# Altium PCB DSP6748_F.PcbDoc (part 15 of 16)
Units mil, origin at the board's own origin, x right, y up, seen from the top; angles counter-clockwise.
Board outline 8188.98 x 4055.12 mil, 4 copper layers (Top Layer, GND, VCC, Bottom Layer); 409 components, 262 nets, 1424 pads, 350 vias.
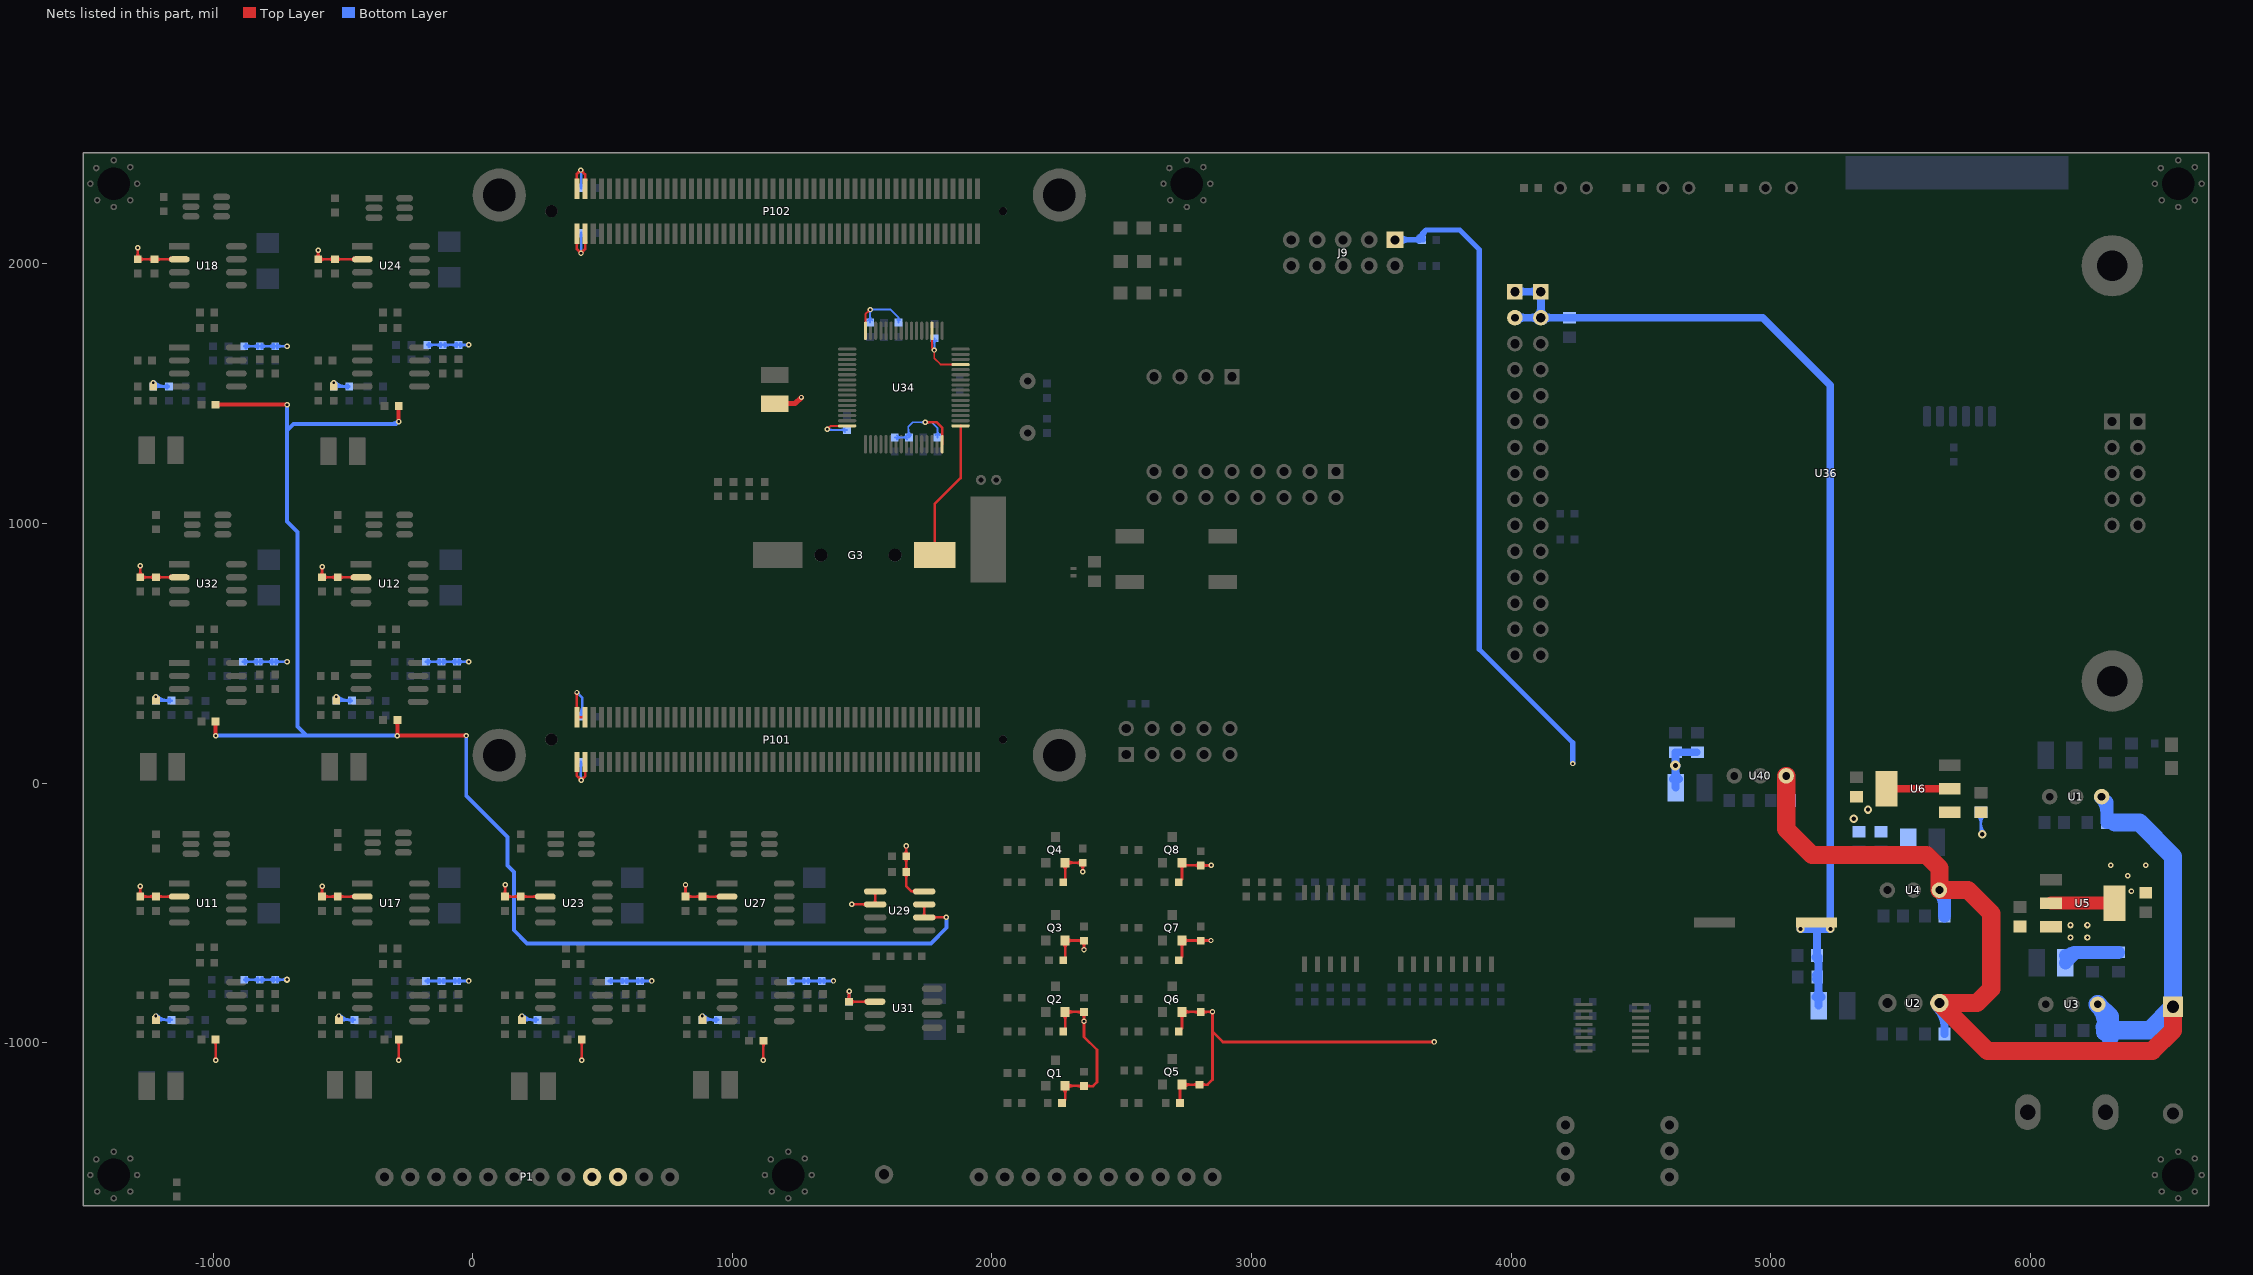
[diagram p17: the nets of this part, all layers, seen from the top]

## Via types
v1: diameter 21, hole 10, Top Layer to Bottom Layer, 244 vias
v2: diameter 20, hole 10, Top Layer to Bottom Layer, 84 vias
v3: diameter 32, hole 16, Top Layer to Bottom Layer, 11 vias
v4: diameter 24, hole 12, Top Layer to Bottom Layer, 7 vias
v5: diameter 39.37, hole 19.68, Top Layer to Bottom Layer, 3 vias
v6: diameter 30, hole 15, Top Layer to Bottom Layer, 1 vias

## Nets (pads, with @x,y where several pads share a name; then routed paths per layer and width w, separated by ;. In a path a pad name is that pad's centre, name@x,y a point inside that pad or via, vN(x,y) a via of type N, cw(c..) or ccw(c..) an arc to the next point about the centre after c; other vN are vias at no path point) (continued)
VCC+5V: (continued)
  Bottom Layer w10: R85.2@-885.19,467.52 C146.2@-825.19,467.52 C145.2@-765.19,467.52 v1(-715.19,467.52) ; R16.2@-880.19,-757.48 C36.2@-820.19,-757.48 C37.2@-760.19,-757.48 v4(-715.19,-757.48) ; R38.2@-880.19,1682.52 C77.2@-820.19,1682.52 C76.2@-760.19,1682.52 v1(-715.19,1682.52) ; R36.2@-180.19,-762.48 C68.2@-120.19,-762.48 C69.2@-60.19,-762.48 v1(-15.19,-762.48) ; R18.2@-180.19,467.52 C44.2@-120.19,467.52 C45.2@-60.19,467.52 v1(-15.19,467.52) ; R60.2@-175.19,1687.52 C108.2@-115.19,1687.52 C107.2@-55.19,1687.52 v1(-15.19,1687.52) ; R58.2@524.81,-762.48 C99.2@584.81,-762.48 C100.2@644.81,-762.48 v1(689.81,-762.48) ; R73.2@1224.81,-762.48 C129.2@1284.81,-762.48 C128.2@1344.81,-762.48 v1(1389.81,-762.48) ; C148.2@1449.81,-842.48 v1(1449.81,-802.48) ; R85.2@-878.12,460.45 cw(c-861.05,443.38) -861.05,467.52 ; R85.2@-878.12,460.45 cw(c-861.05,443.38) -861.05,467.52 ; R85.2@-878.12,460.45 cw(c-861.05,443.38) -861.05,467.52 ; R85.2@-878.12,474.59 ccw(c-861.05,491.66) -861.05,467.52 ; R85.2@-878.12,474.59 ccw(c-861.05,491.66) -861.05,467.52 ; R85.2@-878.12,474.59 ccw(c-861.05,491.66) -861.05,467.52 ; R16.2@-873.12,-764.55 cw(c-856.05,-781.62) -856.05,-757.48 ; R16.2@-873.12,-764.55 cw(c-856.05,-781.62) -856.05,-757.48 ; R16.2@-873.12,-764.55 cw(c-856.05,-781.62) -856.05,-757.48 ; R16.2@-873.12,-750.41 ccw(c-856.05,-733.34) -856.05,-757.48 ; R16.2@-873.12,-750.41 ccw(c-856.05,-733.34) -856.05,-757.48 ; R16.2@-873.12,-750.41 ccw(c-856.05,-733.34) -856.05,-757.48 ; R38.2@-873.12,1675.45 cw(c-856.05,1658.38) -856.05,1682.52 ; R38.2@-873.12,1675.45 cw(c-856.05,1658.38) -856.05,1682.52 ; R38.2@-873.12,1675.45 cw(c-856.05,1658.38) -856.05,1682.52 ; R38.2@-873.12,1689.59 ccw(c-856.05,1706.66) -856.05,1682.52 ; R38.2@-873.12,1689.59 ccw(c-856.05,1706.66) -856.05,1682.52 ; R38.2@-873.12,1689.59 ccw(c-856.05,1706.66) -856.05,1682.52 ; -849.33,467.52 cw(c-849.33,443.38) C146.2@-832.26,460.45 ; -849.33,467.52 ccw(c-849.33,491.66) C146.2@-832.26,474.59 ; -849.33,467.52 cw(c-849.33,443.38) C146.2@-832.26,460.45 ; -849.33,467.52 ccw(c-849.33,491.66) C146.2@-832.26,474.59 ; -849.33,467.52 ccw(c-849.33,491.66) C146.2@-832.26,474.59 ; -849.33,467.52 cw(c-849.33,443.38) C146.2@-832.26,460.45 ; -844.33,-757.48 cw(c-844.33,-781.62) C36.2@-827.26,-764.55 ; -844.33,-757.48 ccw(c-844.33,-733.34) C36.2@-827.26,-750.41 ; -844.33,-757.48 cw(c-844.33,-781.62) C36.2@-827.26,-764.55 ; -844.33,-757.48 ccw(c-844.33,-733.34) C36.2@-827.26,-750.41 ; -844.33,-757.48 ccw(c-844.33,-733.34) C36.2@-827.26,-750.41 ; -844.33,-757.48 cw(c-844.33,-781.62) C36.2@-827.26,-764.55 ; -844.33,1682.52 cw(c-844.33,1658.38) C77.2@-827.26,1675.45 ; -844.33,1682.52 ccw(c-844.33,1706.66) C77.2@-827.26,1689.59 ; -844.33,1682.52 cw(c-844.33,1658.38) C77.2@-827.26,1675.45 ; -844.33,1682.52 ccw(c-844.33,1706.66) C77.2@-827.26,1689.59 ; -844.33,1682.52 ccw(c-844.33,1706.66) C77.2@-827.26,1689.59 ; -844.33,1682.52 cw(c-844.33,1658.38) C77.2@-827.26,1675.45 ; C146.2@-818.12,460.45 cw(c-801.05,443.38) -801.05,467.52 ; C146.2@-818.12,460.45 cw(c-801.05,443.38) -801.05,467.52 ; C146.2@-818.12,460.45 cw(c-801.05,443.38) -801.05,467.52 ; C146.2@-818.12,474.59 ccw(c-801.05,491.66) -801.05,467.52 ; C146.2@-818.12,474.59 ccw(c-801.05,491.66) -801.05,467.52 ; C146.2@-818.12,474.59 ccw(c-801.05,491.66) -801.05,467.52 ; C36.2@-813.12,-764.55 cw(c-796.05,-781.62) -796.05,-757.48 ; C36.2@-813.12,-764.55 cw(c-796.05,-781.62) -796.05,-757.48 ; C36.2@-813.12,-764.55 cw(c-796.05,-781.62) -796.05,-757.48 ; C36.2@-813.12,-750.41 ccw(c-796.05,-733.34) -796.05,-757.48 ; C36.2@-813.12,-750.41 ccw(c-796.05,-733.34) -796.05,-757.48 ; C36.2@-813.12,-750.41 ccw(c-796.05,-733.34) -796.05,-757.48 ; C77.2@-813.12,1675.45 cw(c-796.05,1658.38) -796.05,1682.52 ; C77.2@-813.12,1675.45 cw(c-796.05,1658.38) -796.05,1682.52 ; C77.2@-813.12,1675.45 cw(c-796.05,1658.38) -796.05,1682.52 ; C77.2@-813.12,1689.59 ccw(c-796.05,1706.66) -796.05,1682.52 ; C77.2@-813.12,1689.59 ccw(c-796.05,1706.66) -796.05,1682.52 ; C77.2@-813.12,1689.59 ccw(c-796.05,1706.66) -796.05,1682.52 ; -789.33,467.52 cw(c-789.33,443.38) C145.2@-772.26,460.45 ; -789.33,467.52 ccw(c-789.33,491.66) C145.2@-772.26,474.59 ; -789.33,467.52 cw(c-789.33,443.38) C145.2@-772.26,460.45 ; -789.33,467.52 ccw(c-789.33,491.66) C145.2@-772.26,474.59 ; -789.33,467.52 ccw(c-789.33,491.66) C145.2@-772.26,474.59 ; -789.33,467.52 cw(c-789.33,443.38) C145.2@-772.26,460.45 ; -784.33,-757.48 cw(c-784.33,-781.62) C37.2@-767.26,-764.55 ; -784.33,-757.48 ccw(c-784.33,-733.34) C37.2@-767.26,-750.41 ; -784.33,-757.48 cw(c-784.33,-781.62) C37.2@-767.26,-764.55 ; -784.33,-757.48 ccw(c-784.33,-733.34) C37.2@-767.26,-750.41 ; -784.33,-757.48 ccw(c-784.33,-733.34) C37.2@-767.26,-750.41 ; -784.33,-757.48 cw(c-784.33,-781.62) C37.2@-767.26,-764.55 ; -784.33,1682.52 cw(c-784.33,1658.38) C76.2@-767.26,1675.45 ; -784.33,1682.52 ccw(c-784.33,1706.66) C76.2@-767.26,1689.59 ; -784.33,1682.52 cw(c-784.33,1658.38) C76.2@-767.26,1675.45 ; -784.33,1682.52 ccw(c-784.33,1706.66) C76.2@-767.26,1689.59 ; -784.33,1682.52 ccw(c-784.33,1706.66) C76.2@-767.26,1689.59 ; -784.33,1682.52 cw(c-784.33,1658.38) C76.2@-767.26,1675.45 ; C145.2@-758.12,460.45 cw(c-741.05,443.38) -741.05,467.52 ; C145.2@-758.12,460.45 cw(c-741.05,443.38) -741.05,467.52 ; C145.2@-758.12,460.45 cw(c-741.05,443.38) -741.05,467.52 ; C145.2@-758.12,474.59 ccw(c-741.05,491.66) -741.05,467.52 ; C145.2@-758.12,474.59 ccw(c-741.05,491.66) -741.05,467.52 ; C145.2@-758.12,474.59 ccw(c-741.05,491.66) -741.05,467.52 ; C37.2@-753.12,-764.55 cw(c-736.05,-781.62) -736.05,-757.48 ; C37.2@-753.12,-764.55 cw(c-736.05,-781.62) -736.05,-757.48 ; C37.2@-753.12,-764.55 cw(c-736.05,-781.62) -736.05,-757.48 ; C37.2@-753.12,-750.41 ccw(c-736.05,-733.34) -736.05,-757.48 ; C37.2@-753.12,-750.41 ccw(c-736.05,-733.34) -736.05,-757.48 ; C37.2@-753.12,-750.41 ccw(c-736.05,-733.34) -736.05,-757.48 ; C76.2@-753.12,1675.45 cw(c-736.05,1658.38) -736.05,1682.52 ; C76.2@-753.12,1675.45 cw(c-736.05,1658.38) -736.05,1682.52 ; C76.2@-753.12,1675.45 cw(c-736.05,1658.38) -736.05,1682.52 ; C76.2@-753.12,1689.59 ccw(c-736.05,1706.66) -736.05,1682.52 ; C76.2@-753.12,1689.59 ccw(c-736.05,1706.66) -736.05,1682.52 ; C76.2@-753.12,1689.59 ccw(c-736.05,1706.66) -736.05,1682.52 ; -732.09,-757.48 cw(c-732.09,-774.38) v4@-720.14,-762.43 ; -732.09,-757.48 ccw(c-732.09,-740.58) v4@-720.14,-752.53 ; -732.09,-757.48 cw(c-732.09,-774.38) v4@-720.14,-762.43 ; -732.09,-757.48 ccw(c-732.09,-740.58) v4@-720.14,-752.53 ; -732.09,-757.48 ccw(c-732.09,-740.58) v4@-720.14,-752.53 ; -732.09,-757.48 cw(c-732.09,-774.38) v4@-720.14,-762.43 ; -728.47,467.52 cw(c-728.47,454.24) v1@-719.08,463.63 ; -728.47,467.52 ccw(c-728.47,480.8) v1@-719.08,471.41 ; -728.47,467.52 cw(c-728.47,454.24) v1@-719.08,463.63 ; -728.47,467.52 ccw(c-728.47,480.8) v1@-719.08,471.41 ; -728.47,467.52 ccw(c-728.47,480.8) v1@-719.08,471.41 ; -728.47,467.52 cw(c-728.47,454.24) v1@-719.08,463.63 ; -728.47,1682.52 cw(c-728.47,1669.24) v1@-719.08,1678.63 ; -728.47,1682.52 ccw(c-728.47,1695.8) v1@-719.08,1686.41 ; -728.47,1682.52 cw(c-728.47,1669.24) v1@-719.08,1678.63 ; -728.47,1682.52 ccw(c-728.47,1695.8) v1@-719.08,1686.41 ; -728.47,1682.52 ccw(c-728.47,1695.8) v1@-719.08,1686.41 ; -728.47,1682.52 cw(c-728.47,1669.24) v1@-719.08,1678.63 ; R36.2@-173.12,-769.55 cw(c-156.05,-786.62) -156.05,-762.48 ; R36.2@-173.12,-769.55 cw(c-156.05,-786.62) -156.05,-762.48 ; R36.2@-173.12,-769.55 cw(c-156.05,-786.62) -156.05,-762.48 ; R36.2@-173.12,-755.41 ccw(c-156.05,-738.34) -156.05,-762.48 ; R36.2@-173.12,-755.41 ccw(c-156.05,-738.34) -156.05,-762.48 ; R36.2@-173.12,-755.41 ccw(c-156.05,-738.34) -156.05,-762.48 ; R18.2@-173.12,460.45 cw(c-156.05,443.38) -156.05,467.52 ; R18.2@-173.12,460.45 cw(c-156.05,443.38) -156.05,467.52 ; R18.2@-173.12,460.45 cw(c-156.05,443.38) -156.05,467.52 ; R18.2@-173.12,474.59 ccw(c-156.05,491.66) -156.05,467.52 ; R18.2@-173.12,474.59 ccw(c-156.05,491.66) -156.05,467.52 ; R18.2@-173.12,474.59 ccw(c-156.05,491.66) -156.05,467.52 ; R60.2@-168.12,1680.45 cw(c-151.05,1663.38) -151.05,1687.52 ; R60.2@-168.12,1680.45 cw(c-151.05,1663.38) -151.05,1687.52 ; R60.2@-168.12,1680.45 cw(c-151.05,1663.38) -151.05,1687.52 ; R60.2@-168.12,1694.59 ccw(c-151.05,1711.66) -151.05,1687.52 ; R60.2@-168.12,1694.59 ccw(c-151.05,1711.66) -151.05,1687.52 ; R60.2@-168.12,1694.59 ccw(c-151.05,1711.66) -151.05,1687.52 ; -144.33,-762.48 cw(c-144.33,-786.62) C68.2@-127.26,-769.55 ; -144.33,-762.48 ccw(c-144.33,-738.34) C68.2@-127.26,-755.41 ; -144.33,-762.48 cw(c-144.33,-786.62) C68.2@-127.26,-769.55 ; -144.33,-762.48 ccw(c-144.33,-738.34) C68.2@-127.26,-755.41 ; -144.33,-762.48 ccw(c-144.33,-738.34) C68.2@-127.26,-755.41 ; -144.33,-762.48 cw(c-144.33,-786.62) C68.2@-127.26,-769.55 ; -144.33,467.52 cw(c-144.33,443.38) C44.2@-127.26,460.45 ; -144.33,467.52 ccw(c-144.33,491.66) C44.2@-127.26,474.59 ; -144.33,467.52 cw(c-144.33,443.38) C44.2@-127.26,460.45 ; -144.33,467.52 ccw(c-144.33,491.66) C44.2@-127.26,474.59 ; -144.33,467.52 ccw(c-144.33,491.66) C44.2@-127.26,474.59 ; -144.33,467.52 cw(c-144.33,443.38) C44.2@-127.26,460.45 ; -139.33,1687.52 cw(c-139.33,1663.38) C108.2@-122.26,1680.45 ; -139.33,1687.52 ccw(c-139.33,1711.66) C108.2@-122.26,1694.59 ; -139.33,1687.52 cw(c-139.33,1663.38) C108.2@-122.26,1680.45 ; -139.33,1687.52 ccw(c-139.33,1711.66) C108.2@-122.26,1694.59 ; -139.33,1687.52 ccw(c-139.33,1711.66) C108.2@-122.26,1694.59 ; -139.33,1687.52 cw(c-139.33,1663.38) C108.2@-122.26,1680.45 ; C68.2@-113.12,-769.55 cw(c-96.05,-786.62) -96.05,-762.48 ; C68.2@-113.12,-769.55 cw(c-96.05,-786.62) -96.05,-762.48 ; C68.2@-113.12,-769.55 cw(c-96.05,-786.62) -96.05,-762.48 ; C68.2@-113.12,-755.41 ccw(c-96.05,-738.34) -96.05,-762.48 ; C68.2@-113.12,-755.41 ccw(c-96.05,-738.34) -96.05,-762.48 ; C68.2@-113.12,-755.41 ccw(c-96.05,-738.34) -96.05,-762.48 ; C44.2@-113.12,460.45 cw(c-96.05,443.38) -96.05,467.52 ; C44.2@-113.12,460.45 cw(c-96.05,443.38) -96.05,467.52 ; C44.2@-113.12,460.45 cw(c-96.05,443.38) -96.05,467.52 ; C44.2@-113.12,474.59 ccw(c-96.05,491.66) -96.05,467.52 ; C44.2@-113.12,474.59 ccw(c-96.05,491.66) -96.05,467.52 ; C44.2@-113.12,474.59 ccw(c-96.05,491.66) -96.05,467.52 ; C108.2@-108.12,1680.45 cw(c-91.05,1663.38) -91.05,1687.52 ; C108.2@-108.12,1680.45 cw(c-91.05,1663.38) -91.05,1687.52 ; C108.2@-108.12,1680.45 cw(c-91.05,1663.38) -91.05,1687.52 ; C108.2@-108.12,1694.59 ccw(c-91.05,1711.66) -91.05,1687.52 ; C108.2@-108.12,1694.59 ccw(c-91.05,1711.66) -91.05,1687.52 ; C108.2@-108.12,1694.59 ccw(c-91.05,1711.66) -91.05,1687.52 ; -84.33,-762.48 cw(c-84.33,-786.62) C69.2@-67.26,-769.55 ; -84.33,-762.48 ccw(c-84.33,-738.34) C69.2@-67.26,-755.41 ; -84.33,-762.48 cw(c-84.33,-786.62) C69.2@-67.26,-769.55 ; -84.33,-762.48 ccw(c-84.33,-738.34) C69.2@-67.26,-755.41 ; -84.33,-762.48 ccw(c-84.33,-738.34) C69.2@-67.26,-755.41 ; -84.33,-762.48 cw(c-84.33,-786.62) C69.2@-67.26,-769.55 ; -84.33,467.52 cw(c-84.33,443.38) C45.2@-67.26,460.45 ; -84.33,467.52 ccw(c-84.33,491.66) C45.2@-67.26,474.59 ; -84.33,467.52 cw(c-84.33,443.38) C45.2@-67.26,460.45 ; -84.33,467.52 ccw(c-84.33,491.66) C45.2@-67.26,474.59 ; -84.33,467.52 ccw(c-84.33,491.66) C45.2@-67.26,474.59 ; -84.33,467.52 cw(c-84.33,443.38) C45.2@-67.26,460.45 ; -79.33,1687.52 cw(c-79.33,1663.38) C107.2@-62.26,1680.45 ; -79.33,1687.52 ccw(c-79.33,1711.66) C107.2@-62.26,1694.59 ; -79.33,1687.52 cw(c-79.33,1663.38) C107.2@-62.26,1680.45 ; -79.33,1687.52 ccw(c-79.33,1711.66) C107.2@-62.26,1694.59 ; -79.33,1687.52 ccw(c-79.33,1711.66) C107.2@-62.26,1694.59 ; -79.33,1687.52 cw(c-79.33,1663.38) C107.2@-62.26,1680.45 ; C69.2@-53.12,-769.55 cw(c-36.05,-786.62) -36.05,-762.48 ; C69.2@-53.12,-769.55 cw(c-36.05,-786.62) -36.05,-762.48 ; C69.2@-53.12,-769.55 cw(c-36.05,-786.62) -36.05,-762.48 ; C69.2@-53.12,-755.41 ccw(c-36.05,-738.34) -36.05,-762.48 ; C69.2@-53.12,-755.41 ccw(c-36.05,-738.34) -36.05,-762.48 ; C69.2@-53.12,-755.41 ccw(c-36.05,-738.34) -36.05,-762.48 ; C45.2@-53.12,460.45 cw(c-36.05,443.38) -36.05,467.52 ; C45.2@-53.12,460.45 cw(c-36.05,443.38) -36.05,467.52 ; C45.2@-53.12,460.45 cw(c-36.05,443.38) -36.05,467.52 ; C45.2@-53.12,474.59 ccw(c-36.05,491.66) -36.05,467.52 ; C45.2@-53.12,474.59 ccw(c-36.05,491.66) -36.05,467.52 ; C45.2@-53.12,474.59 ccw(c-36.05,491.66) -36.05,467.52 ; C107.2@-48.12,1680.45 cw(c-31.05,1663.38) -31.05,1687.52 ; C107.2@-48.12,1680.45 cw(c-31.05,1663.38) -31.05,1687.52 ; C107.2@-48.12,1680.45 cw(c-31.05,1663.38) -31.05,1687.52 ; C107.2@-48.12,1694.59 ccw(c-31.05,1711.66) -31.05,1687.52 ; C107.2@-48.12,1694.59 ccw(c-31.05,1711.66) -31.05,1687.52 ; C107.2@-48.12,1694.59 ccw(c-31.05,1711.66) -31.05,1687.52 ; -28.47,-762.48 cw(c-28.47,-775.76) v1@-19.08,-766.37 ; -28.47,-762.48 ccw(c-28.47,-749.2) v1@-19.08,-758.59 ; -28.47,-762.48 cw(c-28.47,-775.76) v1@-19.08,-766.37 ; -28.47,-762.48 ccw(c-28.47,-749.2) v1@-19.08,-758.59 ; -28.47,-762.48 ccw(c-28.47,-749.2) v1@-19.08,-758.59 ; -28.47,-762.48 cw(c-28.47,-775.76) v1@-19.08,-766.37 ; -28.47,467.52 cw(c-28.47,454.24) v1@-19.08,463.63 ; -28.47,467.52 ccw(c-28.47,480.8) v1@-19.08,471.41 ; -28.47,467.52 cw(c-28.47,454.24) v1@-19.08,463.63 ; -28.47,467.52 ccw(c-28.47,480.8) v1@-19.08,471.41 ; -28.47,467.52 ccw(c-28.47,480.8) v1@-19.08,471.41 ; -28.47,467.52 cw(c-28.47,454.24) v1@-19.08,463.63 ; -28.47,1687.52 cw(c-28.47,1674.24) v1@-19.08,1683.63 ; -28.47,1687.52 ccw(c-28.47,1700.8) v1@-19.08,1691.41 ; -28.47,1687.52 cw(c-28.47,1674.24) v1@-19.08,1683.63 ; -28.47,1687.52 ccw(c-28.47,1700.8) v1@-19.08,1691.41 ; -28.47,1687.52 ccw(c-28.47,1700.8) v1@-19.08,1691.41 ; -28.47,1687.52 cw(c-28.47,1674.24) v1@-19.08,1683.63 ; R58.2@531.88,-769.55 cw(c548.95,-786.62) 548.95,-762.48 ; R58.2@531.88,-769.55 cw(c548.95,-786.62) 548.95,-762.48 ; R58.2@531.88,-769.55 cw(c548.95,-786.62) 548.95,-762.48 ; R58.2@531.88,-755.41 ccw(c548.95,-738.34) 548.95,-762.48 ; R58.2@531.88,-755.41 ccw(c548.95,-738.34) 548.95,-762.48 ; R58.2@531.88,-755.41 ccw(c548.95,-738.34) 548.95,-762.48 ; 560.67,-762.48 cw(c560.67,-786.62) C99.2@577.74,-769.55 ; 560.67,-762.48 ccw(c560.67,-738.34) C99.2@577.74,-755.41 ; 560.67,-762.48 cw(c560.67,-786.62) C99.2@577.74,-769.55 ; 560.67,-762.48 ccw(c560.67,-738.34) C99.2@577.74,-755.41 ; 560.67,-762.48 ccw(c560.67,-738.34) C99.2@577.74,-755.41 ; 560.67,-762.48 cw(c560.67,-786.62) C99.2@577.74,-769.55 ; C99.2@591.88,-769.55 cw(c608.95,-786.62) 608.95,-762.48 ; C99.2@591.88,-769.55 cw(c608.95,-786.62) 608.95,-762.48 ; C99.2@591.88,-769.55 cw(c608.95,-786.62) 608.95,-762.48 ; C99.2@591.88,-755.41 ccw(c608.95,-738.34) 608.95,-762.48 ; C99.2@591.88,-755.41 ccw(c608.95,-738.34) 608.95,-762.48 ; C99.2@591.88,-755.41 ccw(c608.95,-738.34) 608.95,-762.48 ; 620.67,-762.48 cw(c620.67,-786.62) C100.2@637.74,-769.55 ; 620.67,-762.48 ccw(c620.67,-738.34) C100.2@637.74,-755.41 ; 620.67,-762.48 cw(c620.67,-786.62) C100.2@637.74,-769.55 ; 620.67,-762.48 ccw(c620.67,-738.34) C100.2@637.74,-755.41 ; 620.67,-762.48 ccw(c620.67,-738.34) C100.2@637.74,-755.41 ; 620.67,-762.48 cw(c620.67,-786.62) C100.2@637.74,-769.55 ; C100.2@651.88,-769.55 cw(c668.95,-786.62) 668.95,-762.48 ; C100.2@651.88,-769.55 cw(c668.95,-786.62) 668.95,-762.48 ; C100.2@651.88,-769.55 cw(c668.95,-786.62) 668.95,-762.48 ; C100.2@651.88,-755.41 ccw(c668.95,-738.34) 668.95,-762.48 ; C100.2@651.88,-755.41 ccw(c668.95,-738.34) 668.95,-762.48 ; C100.2@651.88,-755.41 ccw(c668.95,-738.34) 668.95,-762.48 ; 676.53,-762.48 cw(c676.53,-775.76) v1@685.92,-766.37 ; 676.53,-762.48 ccw(c676.53,-749.2) v1@685.92,-758.59 ; 676.53,-762.48 cw(c676.53,-775.76) v1@685.92,-766.37 ; 676.53,-762.48 ccw(c676.53,-749.2) v1@685.92,-758.59 ; 676.53,-762.48 ccw(c676.53,-749.2) v1@685.92,-758.59 ; 676.53,-762.48 cw(c676.53,-775.76) v1@685.92,-766.37 ; R73.2@1231.88,-769.55 cw(c1248.95,-786.62) 1248.95,-762.48 ; R73.2@1231.88,-769.55 cw(c1248.95,-786.62) 1248.95,-762.48 ; R73.2@1231.88,-769.55 cw(c1248.95,-786.62) 1248.95,-762.48 ; R73.2@1231.88,-755.41 ccw(c1248.95,-738.34) 1248.95,-762.48 ; R73.2@1231.88,-755.41 ccw(c1248.95,-738.34) 1248.95,-762.48 ; R73.2@1231.88,-755.41 ccw(c1248.95,-738.34) 1248.95,-762.48 ; 1260.67,-762.48 cw(c1260.67,-786.62) C129.2@1277.74,-769.55 ; 1260.67,-762.48 ccw(c1260.67,-738.34) C129.2@1277.74,-755.41 ; 1260.67,-762.48 cw(c1260.67,-786.62) C129.2@1277.74,-769.55 ; 1260.67,-762.48 ccw(c1260.67,-738.34) C129.2@1277.74,-755.41 ; 1260.67,-762.48 ccw(c1260.67,-738.34) C129.2@1277.74,-755.41 ; 1260.67,-762.48 cw(c1260.67,-786.62) C129.2@1277.74,-769.55 ; C129.2@1291.88,-769.55 cw(c1308.95,-786.62) 1308.95,-762.48 ; C129.2@1291.88,-769.55 cw(c1308.95,-786.62) 1308.95,-762.48 ; C129.2@1291.88,-769.55 cw(c1308.95,-786.62) 1308.95,-762.48 ; C129.2@1291.88,-755.41 ccw(c1308.95,-738.34) 1308.95,-762.48 ; C129.2@1291.88,-755.41 ccw(c1308.95,-738.34) 1308.95,-762.48 ; C129.2@1291.88,-755.41 ccw(c1308.95,-738.34) 1308.95,-762.48 ; 1320.67,-762.48 cw(c1320.67,-786.62) C128.2@1337.74,-769.55 ; 1320.67,-762.48 ccw(c1320.67,-738.34) C128.2@1337.74,-755.41 ; 1320.67,-762.48 cw(c1320.67,-786.62) C128.2@1337.74,-769.55 ; 1320.67,-762.48 ccw(c1320.67,-738.34) C128.2@1337.74,-755.41 ; 1320.67,-762.48 ccw(c1320.67,-738.34) C128.2@1337.74,-755.41 ; 1320.67,-762.48 cw(c1320.67,-786.62) C128.2@1337.74,-769.55 ; C128.2@1351.88,-769.55 cw(c1368.95,-786.62) 1368.95,-762.48 ; C128.2@1351.88,-769.55 cw(c1368.95,-786.62) 1368.95,-762.48 ; C128.2@1351.88,-769.55 cw(c1368.95,-786.62) 1368.95,-762.48 ; C128.2@1351.88,-755.41 ccw(c1368.95,-738.34) 1368.95,-762.48 ; C128.2@1351.88,-755.41 ccw(c1368.95,-738.34) 1368.95,-762.48 ; C128.2@1351.88,-755.41 ccw(c1368.95,-738.34) 1368.95,-762.48 ; 1376.53,-762.48 cw(c1376.53,-775.76) v1@1385.92,-766.37 ; 1376.53,-762.48 ccw(c1376.53,-749.2) v1@1385.92,-758.59 ; 1376.53,-762.48 cw(c1376.53,-775.76) v1@1385.92,-766.37 ; 1376.53,-762.48 ccw(c1376.53,-749.2) v1@1385.92,-758.59 ; 1376.53,-762.48 ccw(c1376.53,-749.2) v1@1385.92,-758.59 ; 1376.53,-762.48 cw(c1376.53,-775.76) v1@1385.92,-766.37 ; C148.2@1442.74,-835.41 ccw(c1425.67,-818.34) 1449.81,-818.34 ; C148.2@1442.74,-835.41 ccw(c1425.67,-818.34) 1449.81,-818.34 ; C148.2@1442.74,-835.41 ccw(c1425.67,-818.34) 1449.81,-818.34 ; v1@1445.92,-806.37 cw(c1436.53,-815.76) 1449.81,-815.76 ; v1@1445.92,-806.37 cw(c1436.53,-815.76) 1449.81,-815.76 ; v1@1445.92,-806.37 cw(c1436.53,-815.76) 1449.81,-815.76 ; 1449.81,-818.34 ccw(c1473.95,-818.34) C148.2@1456.88,-835.41 ; 1449.81,-818.34 ccw(c1473.95,-818.34) C148.2@1456.88,-835.41 ; 1449.81,-818.34 ccw(c1473.95,-818.34) C148.2@1456.88,-835.41 ; 1449.81,-815.76 cw(c1463.09,-815.76) v1@1453.7,-806.37 ; 1449.81,-815.76 cw(c1463.09,-815.76) v1@1453.7,-806.37 ; 1449.81,-815.76 cw(c1463.09,-815.76) v1@1453.7,-806.37
  other v1: 2849.81,-881.69 6389.81,-417.48 6374.81,-357.48 6309.81,-317.48 6444.81,-317.48
VCC+5V_C: C157.2 C190.2 C191.2 C192.2 C193.2 C203.1 C204.1 J9.1 L5.2 P101.1 P101.2 P101.3 P101.4 P102.1 P102.2 P102.3 P102.4 | length 4705
  Top Layer w10: v2@397.75,345.46 cw(c389.22,336.93) 401.29,336.93 cw(c413.36,336.93) v2@404.83,345.46 ; P101.1@398.15,47.96 cw(c389.88,39.69) 401.58,39.69 cw(c413.28,39.69) P101.1@405.01,47.96 ; P101.2@398.15,287.08 ccw(c390.58,294.65) 401.29,294.65 ; P102.1@398.15,2082.96 cw(c389.88,2074.69) 401.58,2074.69 cw(c413.28,2074.69) P102.1@405.01,2082.96 ; P102.2@398.15,2322.08 ccw(c389.88,2330.35) 401.58,2330.35 ccw(c413.28,2330.35) P102.2@405.01,2322.08 ; P101.2@401.29,254.42 v2(401.29,349) ; 401.29,296.05 ccw(c413.97,296.05) P101.2@405.01,287.08 ; P101.1@401.58,80.91 401.58,27.71 v2(418.29,11) 433.07,25.78 P101.3@433.07,80.91 ; P101.2@401.58,254.13 P101.4@433.07,254.13 ; P102.1@401.58,2115.91 401.58,2056.71 v2(417.29,2041) 433.07,2056.78 P102.3@433.07,2115.91 ; P102.2@401.58,2289.13 401.58,2346.29 v2(416.29,2361) 433.07,2344.22 P102.4@433.07,2289.13 ; P101.2@405.01,250.7 cw(c413.28,242.43) 413.28,254.13 cw(c413.28,265.83) P101.2@405.01,257.56 ; v2@411.29,2361 cw(c399.22,2361) 407.75,2352.46 cw(c416.29,2343.93) 416.29,2356 cw(c416.29,2343.93) 424.83,2352.46 cw(c433.36,2361) v2@421.29,2361 ; v2@412.29,2041 ccw(c400.22,2041) 408.75,2049.54 ccw(c417.29,2058.07) 417.29,2046 ccw(c417.29,2058.07) 425.83,2049.54 ccw(c434.36,2041) v2@422.29,2041 ; v2@413.29,11 ccw(c401.22,11) 409.75,19.54 ccw(c418.29,28.07) 418.29,16 ccw(c418.29,28.07) 426.83,19.54 ccw(c435.36,11) v2@423.29,11 ; P101.3@429.64,47.96 cw(c421.37,39.69) 433.07,39.69 cw(c444.77,39.69) P101.3@436.5,47.96 ; P101.4@429.64,250.7 ccw(c421.37,242.43) 421.37,254.13 ccw(c421.37,265.83) P101.4@429.64,257.56 ; P102.3@429.64,2082.96 cw(c421.37,2074.69) 433.07,2074.69 cw(c444.77,2074.69) P102.3@436.5,2082.96 ; P102.4@429.64,2322.08 ccw(c421.37,2330.35) 433.07,2330.35 ccw(c444.77,2330.35) P102.4@436.5,2322.08
  Bottom Layer w10: v2@401.29,344 cw(c401.29,331.93) 409.83,340.46 cw(c418.36,349) v2@406.29,349 ; v2(401.29,349) 421.29,329 421.29,260.95 C190.2@415.86,255.52 ; C190.2@408.79,262.59 ccw(c378.62,292.76) 421.29,292.76 ; C191.2@409.5,73.84 cw(c392.43,56.77) 416.57,56.77 cw(c440.71,56.77) C191.2@423.64,73.84 ; C192.2@410.71,2111.71 cw(c393.64,2094.64) 417.78,2094.64 cw(c441.92,2094.64) C192.2@424.85,2111.71 ; C193.2@410.71,2299.07 ccw(c393.64,2316.14) 417.78,2316.14 ccw(c441.92,2316.14) C193.2@424.85,2299.07 ; v2@412.75,2357.46 cw(c400.62,2345.33) 417.78,2345.33 ; v2@413.75,2044.54 ccw(c404.04,2054.25) 417.78,2054.25 ; v2(416.29,2361) 417.78,2359.51 C193.2@417.78,2292 ; 416.57,27.23 ccw(c434.52,27.23) v2@421.83,14.54 ; C191.2@416.57,80.91 416.57,12.72 v2(418.29,11) ; v2(417.29,2041) 417.78,2041.49 C192.2@417.78,2118.78 ; 417.78,2051.89 ccw(c428.18,2051.89) v2@420.83,2044.54 ; J9.1@3553.15,2092.52 3554.15,2091.52 C157.2@3657.15,2091.52 ; J9.1@3565.52,2080.15 cw(c3592.98,2052.69) 3592.98,2091.52 ; J9.1@3565.52,2104.89 ccw(c3597.81,2137.18) 3597.81,2091.52 ; J9.1@3572.6,2073.07 cw(c3617.13,2028.54) 3617.13,2091.52 ; J9.1@3572.6,2111.97 ccw(c3621.95,2161.32) 3621.95,2091.52 ; C157.2@3650.08,2084.45 ccw(c3633.01,2067.38) 3633.01,2091.52 ccw(c3633.01,2115.66) C157.2@3650.08,2098.59
  Bottom Layer w20: J9.1@3553.15,2092.52 C157.2@3656.15,2092.52 ; J9.1@3569.06,2076.61 cw(c3607.47,2038.2) 3607.47,2092.52 cw(c3607.47,2146.84) J9.1@3569.06,2108.43 ; C157.2@3642.63,2087.77 cw(c3660.3,2092.33) C157.2@3647.39,2105.24 ; C157.2@3657.15,2092.52 3657.15,2115 3672.15,2130 ; C157.2@3661.99,2092.77 cw(c3699.65,2102.49) 3672.15,2130 ; v2(4237.29,75) 4237.29,155 3877.29,515 3877.29,2055 3802.29,2130 3672.15,2130
  Bottom Layer w30: L5.2@4623.03,15.84 ccw(c4599.42,39.45) 4632.81,39.45 ; v5@4632.81,48.54 ccw(c4679.06,48.54) L5.2@4646.35,15.84 ; 4634.06,43.87 cw(c4661.19,51.14) v5@4636.87,65.18 ; L5.2@4634.69,-17.48 4632.81,-15.6 C204.1@4632.81,118.33 C203.1@4715.31,118.33
  other v5: 4632.81,67.52
VCC+6V5: C12.1 C13.1 C18.1 L3.2 U5.3 | length 659.8
  Bottom Layer w50: L3.2@6134.93,-692.48 6174.93,-652.48 ; C13.1@6339.81,-652.48 C12.1@6239.81,-652.48 6174.93,-652.48 ; L3.2@6136.14,-664.44 ccw(c6144.22,-621.77) 6174.93,-652.48 ; L3.2@6136.14,-664.44 ccw(c6144.22,-621.77) 6174.93,-652.48 ; L3.2@6136.14,-664.44 ccw(c6144.22,-621.77) 6174.93,-652.48 ; L3.2@6139.52,-675.42 cw(c6194.89,-730.79) 6194.89,-652.48 ; L3.2@6139.52,-675.42 cw(c6194.89,-730.79) 6194.89,-652.48 ; L3.2@6139.52,-675.42 cw(c6194.89,-730.79) 6194.89,-652.48 ; L3.2@6140.75,-673.7 cw(c6174.93,-690.61) 6174.93,-652.48 ; L3.2@6140.75,-673.7 cw(c6174.93,-690.61) 6174.93,-652.48 ; L3.2@6140.75,-673.7 cw(c6174.93,-690.61) 6174.93,-652.48
  other v4: 6154.81,-594.92 6219.81,-594.92 6154.81,-547.48 6219.81,-547.48
VCC+12V_ZLG_3G: C8.1 C9.1 C169.1 C170.1 L2.2 U36.J1-1 U36.J1-2 U36.J2-1 U36.J2-2 | length 4577.3
  Bottom Layer w30: U36.J1-2@4014.81,1792.52 U36.J2-2@4114.81,1792.52 ; U36.J1-1@4014.81,1892.52 U36.J2-1@4114.81,1892.52 U36.J2-2@4114.81,1792.52 ; U36.J1-2@4025.42,1781.91 cw(c4051.02,1756.31) 4051.02,1792.52 cw(c4051.02,1828.73) U36.J1-2@4025.42,1803.13 ; U36.J1-1@4025.42,1881.91 cw(c4051.02,1856.31) 4051.02,1892.52 cw(c4051.02,1928.73) U36.J1-1@4025.42,1903.13 ; U36.J2-2@4104.2,1781.91 ccw(c4078.6,1756.31) 4078.6,1792.52 ccw(c4078.6,1828.73) 4104.2,1803.13 ccw(c4078.6,1828.73) 4114.81,1828.73 ccw(c4151.02,1828.73) 4125.42,1803.13 ccw(c4151.02,1828.73) 4151.02,1792.52 ccw(c4151.02,1756.31) U36.J2-2@4125.42,1781.91 ; U36.J2-1@4104.2,1903.13 cw(c4078.6,1928.73) 4078.6,1892.52 cw(c4078.6,1856.31) 4104.2,1881.91 cw(c4078.6,1856.31) 4114.81,1856.31 cw(c4151.02,1856.31) U36.J2-1@4125.42,1881.91 ; v3(5114.81,-562.48) 5179.81,-562.48 ; L2.2@5173.03,-824.16 ccw(c5144.87,-796) 5184.69,-796 ccw(c5224.51,-796) L2.2@5196.35,-824.16 ; C9.1@5173.11,-671.33 cw(c5145.15,-699.29) 5184.69,-699.29 ; C8.1@5174.51,-755.28 cw(c5149.92,-779.87) 5184.69,-779.87 ; C8.1@5174.51,-739.68 ccw(c5149.92,-715.09) 5184.69,-715.09 ; L2.2@5184.69,-857.48 5184.69,-669.8 C9.1@5178.41,-663.52 5178.41,-563.88 5179.81,-562.48 ; U36.J2-2@4114.81,1792.52 C170.1@4224.81,1792.52 4969.81,1792.52 5229.81,1532.52 v3(5229.81,-562.48) 5179.81,-562.48
VCC+24V: C1.1 C6.1 C10.1 C17.1 C201.1 D8.2 P1.9 P1.10 U1.1 U2.1 U3.1 U4.1 U40.1 | length 4944.1
  Top Layer w70: U40.1@5059.81,27.52 5059.81,-177.48 5159.81,-277.48 5599.81,-277.48 5649.81,-327.48 U4.1@5649.81,-412.48 5759.81,-412.48 5849.81,-502.48 5849.81,-792.48 5794.81,-847.48 U2.1@5649.81,-847.48 5834.81,-1032.48 6469.81,-1032.48 6549.81,-952.48 D8.2@6549.81,-861.57
  Bottom Layer w30: U40.1@5049.2,16.91 cw(c4987.38,-44.91) C201.1@5074.81,-44.91 ; U40.1@5059.81,27.52 5074.81,12.52 C201.1@5074.81,-67.48 ; U2.1@5635.36,-861.93 cw(c5552.2,-945.09) C6.1@5669.81,-945.09 ; U2.1@5649.81,-847.48 5669.81,-867.48 C6.1@5669.81,-967.48
  Bottom Layer w50: U4.1@5646.27,-416.02 cw(c5589.45,-472.84) 5669.81,-472.84 ; C17.1@5669.81,-512.48 U4.1@5669.81,-432.48 ; U1.1@6271.27,-56.02 cw(c6214.45,-112.84) 6294.81,-112.84 ; U1.1@6283.9,-61.57 6294.81,-72.48 C1.1@6294.81,-152.48
  Bottom Layer w70: C10.1@6286.61,-939.49 cw(c6261.9,-977.59) 6307.31,-977.59 ; C10.1@6288.65,-958.82 ccw(c6243.6,-913.77) 6307.31,-913.77 ; C10.1@6292.16,-951.93 ccw(c6178.33,-933.97) U3.1@6259.81,-852.48 6307.31,-899.98 6307.31,-952.48 6458.9,-952.48 D8.2@6549.81,-861.57 6549.81,-282.48 6419.81,-152.48 6327.31,-152.48
VCC-5V: C19.1 C21.1 C30.2 C31.2 C38.2 C39.2 C62.2 C63.2 C70.2 C71.2 C93.2 C94.2 C101.2 C102.2 C122.2 C123.2 C139.2 C140.2 R15.1 R17.1 R35.1 R37.1 R57.1 R59.1 R72.1 R84.1 U6.1 | length 3880.1
  Bottom Layer w10: C71.2@-1240.44,1532.27 ccw(c-1228.98,1543.73) C71.2@-1228.98,1527.52 ; C71.2@-1234.08,1538.63 cw(c-1243.47,1529.24) -1230.19,1529.24 cw(c-1216.91,1529.24) C71.2@-1226.3,1538.63 ; C71.2@-1233.37,1539.34 ccw(c-1204.84,1567.87) -1204.84,1527.52 ; C30.2@-1230.44,-907.73 ccw(c-1218.98,-896.27) C30.2@-1218.98,-912.48 ; C140.2@-1230.44,322.27 ccw(c-1218.98,333.73) C140.2@-1218.98,317.52 ; C71.2@-1230.19,1527.52 R37.1@-1170.19,1527.52 ; v1@-1226.3,1546.41 ccw(c-1180.7,1592.01) R37.1@-1180.7,1527.52 ; C30.2@-1224.08,-901.37 cw(c-1233.47,-910.76) -1220.19,-910.76 cw(c-1206.91,-910.76) C30.2@-1216.3,-901.37 ; C140.2@-1224.08,328.63 cw(c-1233.47,319.24) -1220.19,319.24 cw(c-1206.91,319.24) C140.2@-1216.3,328.63 ; C30.2@-1223.37,-900.66 ccw(c-1194.84,-872.13) -1194.84,-912.48 ; C140.2@-1223.37,329.34 ccw(c-1194.84,357.87) -1194.84,317.52 ; C30.2@-1220.19,-912.48 R15.1@-1160.19,-912.48 ; C140.2@-1220.19,317.52 R84.1@-1160.19,317.52 ; v1@-1216.3,-893.59 ccw(c-1170.7,-847.99) R15.1@-1170.7,-912.48 ; v1@-1216.3,336.41 ccw(c-1170.7,382.01) R84.1@-1170.7,317.52 ; C102.2@-545.44,1532.27 ccw(c-533.98,1543.73) C102.2@-533.98,1527.52 ; C102.2@-539.08,1538.63 cw(c-548.47,1529.24) -535.19,1529.24 cw(c-521.91,1529.24) C102.2@-531.3,1538.63 ; C102.2@-538.37,1539.34 ccw(c-509.84,1567.87) -509.84,1527.52 ; C39.2@-535.44,322.27 ccw(c-523.98,333.73) C39.2@-523.98,317.52 ; C102.2@-535.19,1527.52 R59.1@-475.19,1527.52 ; v1@-531.3,1546.41 ccw(c-485.7,1592.01) R59.1@-485.7,1527.52 ; C39.2@-529.08,328.63 cw(c-538.47,319.24) -525.19,319.24 cw(c-511.91,319.24) C39.2@-521.3,328.63 ; C39.2@-528.37,329.34 ccw(c-499.84,357.87) -499.84,317.52 ; C63.2@-525.44,-907.73 ccw(c-513.98,-896.27) C63.2@-513.98,-912.48 ; C39.2@-525.19,317.52 R17.1@-465.19,317.52 ; v1@-521.3,336.41 ccw(c-475.7,382.01) R17.1@-475.7,317.52 ; C63.2@-519.08,-901.37 cw(c-528.47,-910.76) -515.19,-910.76 cw(c-501.91,-910.76) C63.2@-511.3,-901.37 ; C63.2@-518.37,-900.66 ccw(c-489.84,-872.13) -489.84,-912.48 ; C63.2@-515.19,-912.48 R35.1@-455.19,-912.48 ; v1@-511.3,-893.59 ccw(c-465.7,-847.99) R35.1@-465.7,-912.48 ; C94.2@179.56,-907.73 ccw(c191.02,-896.27) C94.2@191.02,-912.48 ; C94.2@185.92,-901.37 cw(c176.53,-910.76) 189.81,-910.76 cw(c203.09,-910.76) C94.2@193.7,-901.37 ; C94.2@186.63,-900.66 ccw(c215.16,-872.13) 215.16,-912.48 ; C94.2@189.81,-912.48 R57.1@249.81,-912.48 ; v1@193.7,-893.59 ccw(c239.3,-847.99) R57.1@239.3,-912.48 ; C123.2@874.56,-907.73 ccw(c886.02,-896.27) C123.2@886.02,-912.48 ; C123.2@880.92,-901.37 cw(c871.53,-910.76) 884.81,-910.76 cw(c898.09,-910.76) C123.2@888.7,-901.37 ; C123.2@881.63,-900.66 ccw(c910.16,-872.13) 910.16,-912.48 ; C123.2@884.81,-912.48 R72.1@944.81,-912.48 ; v1@888.7,-893.59 ccw(c934.3,-847.99) R72.1@934.3,-912.48 ; C21.1@5797.44,-124.85 cw(c5767.56,-154.73) 5809.81,-154.73 cw(c5852.06,-154.73) C21.1@5822.18,-124.85 ; 5809.81,-158.85 ccw(c5853.44,-158.85) v3@5822.59,-189.7 ; C21.1@5809.81,-112.48 5809.81,-192.48 v3(5814.81,-197.48) ; v1@-1224.88,1543.94 ccw(c-1201.07,1550.32) -1213.39,1528.97 ; v1@-1224.88,1543.94 ccw(c-1201.07,1550.32) -1213.39,1528.97 ; v1@-1224.88,1543.94 ccw(c-1201.07,1550.32) -1213.39,1528.97 ; C71.2@-1223.12,1520.45 cw(c-1206.05,1503.38) -1206.05,1527.52 ; C71.2@-1223.12,1520.45 cw(c-1206.05,1503.38) -1206.05,1527.52 ; C71.2@-1223.12,1520.45 cw(c-1206.05,1503.38) -1206.05,1527.52 ; C71.2@-1223.12,1534.59 ccw(c-1206.05,1551.66) -1206.05,1527.52 ; C71.2@-1223.12,1534.59 ccw(c-1206.05,1551.66) -1206.05,1527.52 ; C71.2@-1223.12,1534.59 ccw(c-1206.05,1551.66) -1206.05,1527.52 ; v1@-1214.88,-896.06 ccw(c-1191.07,-889.68) -1203.39,-911.03 ; v1@-1214.88,-896.06 ccw(c-1191.07,-889.68) -1203.39,-911.03 ; v1@-1214.88,-896.06 ccw(c-1191.07,-889.68) -1203.39,-911.03 ; v1@-1214.88,333.94 ccw(c-1191.07,340.32) -1203.39,318.97 ; v1@-1214.88,333.94 ccw(c-1191.07,340.32) -1203.39,318.97 ; v1@-1214.88,333.94 ccw(c-1191.07,340.32) -1203.39,318.97 ; C30.2@-1213.12,-919.55 cw(c-1196.05,-936.62) -1196.05,-912.48 ; C30.2@-1213.12,-919.55 cw(c-1196.05,-936.62) -1196.05,-912.48 ; C30.2@-1213.12,-919.55 cw(c-1196.05,-936.62) -1196.05,-912.48 ; C30.2@-1213.12,-905.41 ccw(c-1196.05,-888.34) -1196.05,-912.48 ; C30.2@-1213.12,-905.41 ccw(c-1196.05,-888.34) -1196.05,-912.48 ; C30.2@-1213.12,-905.41 ccw(c-1196.05,-888.34) -1196.05,-912.48 ; C140.2@-1213.12,310.45 cw(c-1196.05,293.38) -1196.05,317.52 ; C140.2@-1213.12,310.45 cw(c-1196.05,293.38) -1196.05,317.52 ; C140.2@-1213.12,310.45 cw(c-1196.05,293.38) -1196.05,317.52 ; C140.2@-1213.12,324.59 ccw(c-1196.05,341.66) -1196.05,317.52 ; C140.2@-1213.12,324.59 ccw(c-1196.05,341.66) -1196.05,317.52 ; C140.2@-1213.12,324.59 ccw(c-1196.05,341.66) -1196.05,317.52 ; -1194.33,1527.52 cw(c-1194.33,1503.38) R37.1@-1177.26,1520.45 ; -1194.33,1527.52 ccw(c-1194.33,1551.66) R37.1@-1177.26,1534.59 ; -1194.33,1527.52 cw(c-1194.33,1503.38) R37.1@-1177.26,1520.45 ; -1194.33,1527.52 ccw(c-1194.33,1551.66) R37.1@-1177.26,1534.59 ; -1194.33,1527.52 ccw(c-1194.33,1551.66) R37.1@-1177.26,1534.59 ; -1194.33,1527.52 cw(c-1194.33,1503.38) R37.1@-1177.26,1520.45 ; -1184.33,-912.48 cw(c-1184.33,-936.62) R15.1@-1167.26,-919.55 ; -1184.33,-912.48 ccw(c-1184.33,-888.34) R15.1@-1167.26,-905.41 ; -1184.33,-912.48 cw(c-1184.33,-936.62) R15.1@-1167.26,-919.55 ; -1184.33,-912.48 ccw(c-1184.33,-888.34) R15.1@-1167.26,-905.41 ; -1184.33,-912.48 ccw(c-1184.33,-888.34) R15.1@-1167.26,-905.41 ; -1184.33,-912.48 cw(c-1184.33,-936.62) R15.1@-1167.26,-919.55 ; -1184.33,317.52 cw(c-1184.33,293.38) R84.1@-1167.26,310.45 ; -1184.33,317.52 ccw(c-1184.33,341.66) R84.1@-1167.26,324.59 ; -1184.33,317.52 cw(c-1184.33,293.38) R84.1@-1167.26,310.45 ; -1184.33,317.52 ccw(c-1184.33,341.66) R84.1@-1167.26,324.59 ; -1184.33,317.52 ccw(c-1184.33,341.66) R84.1@-1167.26,324.59 ; -1184.33,317.52 cw(c-1184.33,293.38) R84.1@-1167.26,310.45 ; v1@-529.88,1543.94 ccw(c-506.07,1550.32) -518.39,1528.97 ; v1@-529.88,1543.94 ccw(c-506.07,1550.32) -518.39,1528.97 ; v1@-529.88,1543.94 ccw(c-506.07,1550.32) -518.39,1528.97 ; C102.2@-528.12,1520.45 cw(c-511.05,1503.38) -511.05,1527.52 ; C102.2@-528.12,1520.45 cw(c-511.05,1503.38) -511.05,1527.52 ; C102.2@-528.12,1520.45 cw(c-511.05,1503.38) -511.05,1527.52 ; C102.2@-528.12,1534.59 ccw(c-511.05,1551.66) -511.05,1527.52 ; C102.2@-528.12,1534.59 ccw(c-511.05,1551.66) -511.05,1527.52 ; C102.2@-528.12,1534.59 ccw(c-511.05,1551.66) -511.05,1527.52 ; v1@-519.88,333.94 ccw(c-496.07,340.32) -508.39,318.97 ; v1@-519.88,333.94 ccw(c-496.07,340.32) -508.39,318.97 ; v1@-519.88,333.94 ccw(c-496.07,340.32) -508.39,318.97 ; C39.2@-518.12,310.45 cw(c-501.05,293.38) -501.05,317.52 ; C39.2@-518.12,310.45 cw(c-501.05,293.38) -501.05,317.52 ; C39.2@-518.12,310.45 cw(c-501.05,293.38) -501.05,317.52 ; C39.2@-518.12,324.59 ccw(c-501.05,341.66) -501.05,317.52 ; C39.2@-518.12,324.59 ccw(c-501.05,341.66) -501.05,317.52 ; C39.2@-518.12,324.59 ccw(c-501.05,341.66) -501.05,317.52 ; v1@-509.88,-896.06 ccw(c-486.07,-889.68) -498.39,-911.03 ; v1@-509.88,-896.06 ccw(c-486.07,-889.68) -498.39,-911.03 ; v1@-509.88,-896.06 ccw(c-486.07,-889.68) -498.39,-911.03 ; C63.2@-508.12,-919.55 cw(c-491.05,-936.62) -491.05,-912.48 ; C63.2@-508.12,-919.55 cw(c-491.05,-936.62) -491.05,-912.48 ; C63.2@-508.12,-919.55 cw(c-491.05,-936.62) -491.05,-912.48 ; C63.2@-508.12,-905.41 ccw(c-491.05,-888.34) -491.05,-912.48 ; C63.2@-508.12,-905.41 ccw(c-491.05,-888.34) -491.05,-912.48 ; C63.2@-508.12,-905.41 ccw(c-491.05,-888.34) -491.05,-912.48 ; -499.33,1527.52 cw(c-499.33,1503.38) R59.1@-482.26,1520.45 ; -499.33,1527.52 ccw(c-499.33,1551.66) R59.1@-482.26,1534.59 ; -499.33,1527.52 cw(c-499.33,1503.38) R59.1@-482.26,1520.45 ; -499.33,1527.52 ccw(c-499.33,1551.66) R59.1@-482.26,1534.59 ; -499.33,1527.52 ccw(c-499.33,1551.66) R59.1@-482.26,1534.59 ; -499.33,1527.52 cw(c-499.33,1503.38) R59.1@-482.26,1520.45 ; -489.33,317.52 cw(c-489.33,293.38) R17.1@-472.26,310.45 ; -489.33,317.52 ccw(c-489.33,341.66) R17.1@-472.26,324.59 ; -489.33,317.52 cw(c-489.33,293.38) R17.1@-472.26,310.45 ; -489.33,317.52 ccw(c-489.33,341.66) R17.1@-472.26,324.59 ; -489.33,317.52 ccw(c-489.33,341.66) R17.1@-472.26,324.59 ; -489.33,317.52 cw(c-489.33,293.38) R17.1@-472.26,310.45 ; -479.33,-912.48 cw(c-479.33,-936.62) R35.1@-462.26,-919.55 ; -479.33,-912.48 ccw(c-479.33,-888.34) R35.1@-462.26,-905.41 ; -479.33,-912.48 cw(c-479.33,-936.62) R35.1@-462.26,-919.55 ; -479.33,-912.48 ccw(c-479.33,-888.34) R35.1@-462.26,-905.41 ; -479.33,-912.48 ccw(c-479.33,-888.34) R35.1@-462.26,-905.41 ; -479.33,-912.48 cw(c-479.33,-936.62) R35.1@-462.26,-919.55 ; v1@195.12,-896.06 ccw(c218.93,-889.68) 206.61,-911.03 ; v1@195.12,-896.06 ccw(c218.93,-889.68) 206.61,-911.03 ; v1@195.12,-896.06 ccw(c218.93,-889.68) 206.61,-911.03 ; C94.2@196.88,-919.55 cw(c213.95,-936.62) 213.95,-912.48 ; C94.2@196.88,-919.55 cw(c213.95,-936.62) 213.95,-912.48 ; C94.2@196.88,-919.55 cw(c213.95,-936.62) 213.95,-912.48 ; C94.2@196.88,-905.41 ccw(c213.95,-888.34) 213.95,-912.48 ; C94.2@196.88,-905.41 ccw(c213.95,-888.34) 213.95,-912.48 ; C94.2@196.88,-905.41 ccw(c213.95,-888.34) 213.95,-912.48 ; 225.67,-912.48 cw(c225.67,-936.62) R57.1@242.74,-919.55 ; 225.67,-912.48 ccw(c225.67,-888.34) R57.1@242.74,-905.41 ; 225.67,-912.48 cw(c225.67,-936.62) R57.1@242.74,-919.55 ; 225.67,-912.48 ccw(c225.67,-888.34) R57.1@242.74,-905.41 ; 225.67,-912.48 ccw(c225.67,-888.34) R57.1@242.74,-905.41 ; 225.67,-912.48 cw(c225.67,-936.62) R57.1@242.74,-919.55 ; v1@890.12,-896.06 ccw(c913.93,-889.68) 901.61,-911.03 ; v1@890.12,-896.06 ccw(c913.93,-889.68) 901.61,-911.03 ; v1@890.12,-896.06 ccw(c913.93,-889.68) 901.61,-911.03 ; C123.2@891.88,-919.55 cw(c908.95,-936.62) 908.95,-912.48 ; C123.2@891.88,-919.55 cw(c908.95,-936.62) 908.95,-912.48 ; C123.2@891.88,-919.55 cw(c908.95,-936.62) 908.95,-912.48 ; C123.2@891.88,-905.41 ccw(c908.95,-888.34) 908.95,-912.48 ; C123.2@891.88,-905.41 ccw(c908.95,-888.34) 908.95,-912.48 ; C123.2@891.88,-905.41 ccw(c908.95,-888.34) 908.95,-912.48 ; 920.67,-912.48 cw(c920.67,-936.62) R72.1@937.74,-919.55 ; 920.67,-912.48 ccw(c920.67,-888.34) R72.1@937.74,-905.41 ; 920.67,-912.48 cw(c920.67,-936.62) R72.1@937.74,-919.55 ; 920.67,-912.48 ccw(c920.67,-888.34) R72.1@937.74,-905.41 ; 920.67,-912.48 ccw(c920.67,-888.34) R72.1@937.74,-905.41 ; 920.67,-912.48 cw(c920.67,-936.62) R72.1@937.74,-919.55
  other v1: -1220.19,-897.48 -515.19,-897.48 189.81,-897.48 884.81,-897.48 -1220.19,332.52 -525.19,332.52 -1230.19,1542.52 -535.19,1542.52
VCC-6V5: C15.1 C16.1 C22.1 L4.2 U6.2 U6.4 | length 244.1
  Top Layer w30: U6.4@5445.72,-21.93 U6.2@5689.81,-21.93
  other v3: 5319.81,-137.48 5374.81,-102.48
VCC_MCU: C186.2 C187.2 C188.2 C189.2 L6.2 R160.1 R161.1 R162.1 U34.13 U34.19 U34.32 U34.48 U34.64 | length 1798.5
  Top Layer w7: v2(1366.15,1362.52) 1379.51,1375.88 U34.48@1442.31,1375.88 ; v2@1366.15,1369.02 ccw(c1366.15,1384.71) 1377.25,1373.62 ccw(c1388.34,1362.52) v2@1372.65,1362.52 ; U34.32@1513.17,1742.02 1513.17,1807.54 v2@1529.15,1823.52 ; 1516.64,1811.01 cw(c1531.15,1796.5) v2@1531.15,1817.02 ; 1521.47,1815.84 ccw(c1513.79,1823.52) v2@1524.65,1823.52 ; U34.19@1769.08,1742.02 1769.08,1676.59 ; v2@1771.72,1668.51 ccw(c1762.42,1669.94) 1769.08,1676.59 ; v2@1777.16,1673.94 cw(c1775.73,1683.25) 1769.08,1676.59 ; U34.13@1879.31,1612.1 1802.57,1612.1 1778.15,1636.52 v2(1778.15,1667.52) 1769.08,1676.59
  Top Layer w10: v2(1743.15,1389.52) 1788.15,1389.52 1808.45,1369.22 U34.64@1808.45,1305.02 ; v2@1746.69,1385.98 cw(c1755.22,1377.45) 1755.22,1389.52 cw(c1755.22,1401.59) v2@1746.69,1393.06
  Top Layer w20: L6.2@1164.15,1461.4 1242.03,1461.4 v2(1266.15,1485.52)
  Bottom Layer w7: v2(1366.15,1362.52) 1368.42,1360.25 C189.2@1442.31,1360.25 ; v2@1370.75,1357.92 cw(c1376.37,1352.3) 1376.37,1360.25 ; v2@1370.75,1367.12 ccw(c1387.32,1383.69) 1387.32,1360.25 ; C189.2@1434.17,1352.12 ccw(c1414.54,1332.49) 1414.54,1360.25 ccw(c1414.54,1388.02) C189.2@1434.17,1368.38 ; C188.2@1522.68,1781.65 ccw(c1503.05,1801.28) 1530.81,1801.28 ccw(c1558.57,1801.28) C188.2@1538.94,1781.65 ; v2@1526.55,1818.92 cw(c1516.28,1808.65) 1530.81,1808.65 ; C188.2@1530.81,1773.52 v2@1530.81,1823.52 ; 1530.81,1807.01 cw(c1547.66,1807.01) 1535.75,1818.92 cw(c1546.84,1807.83) 1546.84,1823.52 cw(c1546.84,1839.21) v2@1535.75,1828.12 ; v2@1530.81,1821.86 1529.15,1823.52 1610.15,1823.52 1640.81,1792.86 ; R160.1@1625.81,1331.52 R161.1@1680.81,1331.52 1678.15,1334.18 1678.15,1372.52 1695.15,1389.52 v2(1743.15,1389.52) 1768.15,1389.52 1790.81,1366.86 C186.2@1790.81,1331.52 ; R160.1@1633.94,1323.39 cw(c1653.57,1303.76) 1653.57,1331.52 cw(c1653.57,1359.28) R160.1@1633.94,1339.65 ; R162.1@1635.32,1783.62 ccw(c1630.3,1792.86) 1640.81,1792.86 ; R162.1@1640.81,1773.52 1640.81,1792.86 ; R162.1@1646.3,1783.62 cw(c1651.32,1792.86) 1640.81,1792.86 ; R161.1@1672.68,1323.39 ccw(c1653.05,1303.76) 1653.05,1331.52 ccw(c1653.05,1359.28) 1672.68,1339.65 ccw(c1659.47,1352.86) 1678.15,1352.86 ; 1678.15,1348.81 ccw(c1698.1,1348.81) R161.1@1683.99,1334.7 ; 1678.15,1365.7 ccw(c1714.99,1365.7) R161.1@1688.94,1339.65 ; v2@1738.55,1384.92 ccw(c1727.46,1373.83) 1727.46,1389.52 ccw(c1727.46,1405.21) v2@1738.55,1394.12 ; v2@1747.75,1384.92 cw(c1758.84,1373.83) 1758.84,1389.52 cw(c1758.84,1405.21) v2@1747.75,1394.12 ; C187.2@1770.68,1705.39 cw(c1751.05,1685.76) 1778.81,1685.76 cw(c1806.57,1685.76) C187.2@1786.94,1705.39 ; v2@1773.55,1672.12 ccw(c1760.86,1684.81) 1778.81,1684.81 ; v2(1778.15,1667.52) 1778.81,1668.18 C187.2@1778.81,1713.52 ; 1778.81,1681.62 ccw(c1792.25,1681.62) v2@1782.75,1672.12 ; C186.2@1782.68,1339.65 ccw(c1763.05,1359.28) 1790.81,1359.28 ccw(c1818.57,1359.28) C186.2@1798.94,1339.65
  other v2: 1531.15,1823.52
VDD_RTC: G3.1 U34.1 | length 539.9
  Top Layer w10: G3.1@1779.15,877.52 1779.15,1074.52 1879.31,1174.68 U34.1@1879.31,1375.88
VREF1+1.3V: R12.1 R33.1 R54.1 R70.1 U29.1 U29.2 | length 1463
  Top Layer w10: v1(-990.19,-1067.48) R12.1@-990.19,-987.48 ; v1(-285.19,-1067.48) R33.1@-285.19,-987.48 ; v1(419.81,-1067.48) R54.1@419.81,-987.48 R54.1@424.81,-992.48 ; v1(1119.81,-1067.48) R70.1@1119.81,-992.48 ; v1(1459.81,-467.48) U29.2@1550.32,-467.48 U29.1@1550.32,-417.48 ; R12.1@-997.26,-994.55 cw(c-1014.33,-1011.62) -990.19,-1011.62 ; R12.1@-997.26,-994.55 cw(c-1014.33,-1011.62) -990.19,-1011.62 ; R12.1@-997.26,-994.55 cw(c-1014.33,-1011.62) -990.19,-1011.62 ; v1@-994.08,-1063.59 ccw(c-1003.47,-1054.2) -990.19,-1054.2 ; v1@-994.08,-1063.59 ccw(c-1003.47,-1054.2) -990.19,-1054.2 ; v1@-994.08,-1063.59 ccw(c-1003.47,-1054.2) -990.19,-1054.2 ; -990.19,-1054.2 ccw(c-976.91,-1054.2) v1@-986.3,-1063.59 ; -990.19,-1054.2 ccw(c-976.91,-1054.2) v1@-986.3,-1063.59 ; -990.19,-1054.2 ccw(c-976.91,-1054.2) v1@-986.3,-1063.59 ; -990.19,-1011.62 cw(c-966.05,-1011.62) R12.1@-983.12,-994.55 ; -990.19,-1011.62 cw(c-966.05,-1011.62) R12.1@-983.12,-994.55 ; -990.19,-1011.62 cw(c-966.05,-1011.62) R12.1@-983.12,-994.55 ; R33.1@-292.26,-994.55 cw(c-309.33,-1011.62) -285.19,-1011.62 ; R33.1@-292.26,-994.55 cw(c-309.33,-1011.62) -285.19,-1011.62 ; R33.1@-292.26,-994.55 cw(c-309.33,-1011.62) -285.19,-1011.62 ; v1@-289.08,-1063.59 ccw(c-298.47,-1054.2) -285.19,-1054.2 ; v1@-289.08,-1063.59 ccw(c-298.47,-1054.2) -285.19,-1054.2 ; v1@-289.08,-1063.59 ccw(c-298.47,-1054.2) -285.19,-1054.2 ; -285.19,-1054.2 ccw(c-271.91,-1054.2) v1@-281.3,-1063.59 ; -285.19,-1054.2 ccw(c-271.91,-1054.2) v1@-281.3,-1063.59 ; -285.19,-1054.2 ccw(c-271.91,-1054.2) v1@-281.3,-1063.59 ; -285.19,-1011.62 cw(c-261.05,-1011.62) R33.1@-278.12,-994.55 ; -285.19,-1011.62 cw(c-261.05,-1011.62) R33.1@-278.12,-994.55 ; -285.19,-1011.62 cw(c-261.05,-1011.62) R33.1@-278.12,-994.55 ; R54.1@412.74,-994.55 cw(c395.67,-1011.62) 419.81,-1011.62 ; R54.1@412.74,-994.55 cw(c395.67,-1011.62) 419.81,-1011.62 ; R54.1@412.74,-994.55 cw(c395.67,-1011.62) 419.81,-1011.62 ; v1@415.92,-1063.59 ccw(c406.53,-1054.2) 419.81,-1054.2 ; v1@415.92,-1063.59 ccw(c406.53,-1054.2) 419.81,-1054.2 ; v1@415.92,-1063.59 ccw(c406.53,-1054.2) 419.81,-1054.2 ; 419.81,-1054.2 ccw(c433.09,-1054.2) v1@423.7,-1063.59 ; 419.81,-1054.2 ccw(c433.09,-1054.2) v1@423.7,-1063.59 ; 419.81,-1054.2 ccw(c433.09,-1054.2) v1@423.7,-1063.59 ; 419.81,-1011.62 cw(c443.95,-1011.62) R54.1@426.88,-994.55 ; 419.81,-1011.62 cw(c443.95,-1011.62) R54.1@426.88,-994.55 ; 419.81,-1011.62 cw(c443.95,-1011.62) R54.1@426.88,-994.55 ; R70.1@1112.74,-999.55 cw(c1095.67,-1016.62) 1119.81,-1016.62 ; R70.1@1112.74,-999.55 cw(c1095.67,-1016.62) 1119.81,-1016.62 ; R70.1@1112.74,-999.55 cw(c1095.67,-1016.62) 1119.81,-1016.62 ; v1@1115.92,-1063.59 ccw(c1106.53,-1054.2) 1119.81,-1054.2 ; v1@1115.92,-1063.59 ccw(c1106.53,-1054.2) 1119.81,-1054.2 ; v1@1115.92,-1063.59 ccw(c1106.53,-1054.2) 1119.81,-1054.2 ; 1119.81,-1054.2 ccw(c1133.09,-1054.2) v1@1123.7,-1063.59 ; 1119.81,-1054.2 ccw(c1133.09,-1054.2) v1@1123.7,-1063.59 ; 1119.81,-1054.2 ccw(c1133.09,-1054.2) v1@1123.7,-1063.59 ; 1119.81,-1016.62 cw(c1143.95,-1016.62) R70.1@1126.88,-999.55 ; 1119.81,-1016.62 cw(c1143.95,-1016.62) R70.1@1126.88,-999.55 ; 1119.81,-1016.62 cw(c1143.95,-1016.62) R70.1@1126.88,-999.55 ; v1@1463.7,-471.37 cw(c1473.09,-480.76) 1473.09,-467.48 ; v1@1463.7,-471.37 cw(c1473.09,-480.76) 1473.09,-467.48 ; v1@1463.7,-471.37 cw(c1473.09,-480.76) 1473.09,-467.48 ; v1@1463.7,-463.59 ccw(c1473.09,-454.2) 1473.09,-467.48 ; v1@1463.7,-463.59 ccw(c1473.09,-454.2) 1473.09,-467.48 ; v1@1463.7,-463.59 ccw(c1473.09,-454.2) 1473.09,-467.48 ; 1502.38,-467.48 cw(c1502.38,-483.92) U29.2@1514.01,-472.3 ; 1502.38,-467.48 ccw(c1502.38,-451.04) U29.2@1514.01,-462.66 ; 1502.38,-467.48 cw(c1502.38,-483.92) U29.2@1514.01,-472.3 ; 1502.38,-467.48 ccw(c1502.38,-451.04) U29.2@1514.01,-462.66 ; 1502.38,-467.48 ccw(c1502.38,-451.04) U29.2@1514.01,-462.66 ; 1502.38,-467.48 cw(c1502.38,-483.92) U29.2@1514.01,-472.3 ; U29.2@1545.51,-462.66 ccw(c1533.88,-451.04) 1550.32,-451.04 ; U29.2@1545.51,-462.66 ccw(c1533.88,-451.04) 1550.32,-451.04 ; U29.2@1545.51,-462.66 ccw(c1533.88,-451.04) 1550.32,-451.04 ; U29.1@1545.51,-422.3 cw(c1533.88,-433.92) 1550.32,-433.92 ; U29.1@1545.51,-422.3 cw(c1533.88,-433.92) 1550.32,-433.92 ; U29.1@1545.51,-422.3 cw(c1533.88,-433.92) 1550.32,-433.92 ; 1550.32,-451.04 ccw(c1566.76,-451.04) U29.2@1555.14,-462.66 ; 1550.32,-451.04 ccw(c1566.76,-451.04) U29.2@1555.14,-462.66 ; 1550.32,-451.04 ccw(c1566.76,-451.04) U29.2@1555.14,-462.66 ; 1550.32,-433.92 cw(c1566.76,-433.92) U29.1@1555.14,-422.3 ; 1550.32,-433.92 cw(c1566.76,-433.92) U29.1@1555.14,-422.3 ; 1550.32,-433.92 cw(c1566.76,-433.92) U29.1@1555.14,-422.3
VREF2+1.3V: R13.1 R34.1 R55.1 R83.1 U29.6 U29.7 | length 6547.2
  Top Layer w10: U29.7@1739.3,-467.48 U29.6@1739.3,-517.48 v1(1824.81,-517.48) ; U29.6@1734.48,-512.66 ccw(c1722.85,-501.04) 1739.3,-501.04 ; U29.6@1734.48,-512.66 ccw(c1722.85,-501.04) 1739.3,-501.04 ; U29.6@1734.48,-512.66 ccw(c1722.85,-501.04) 1739.3,-501.04 ; U29.7@1734.48,-472.3 cw(c1722.85,-483.92) 1739.3,-483.92 ; U29.7@1734.48,-472.3 cw(c1722.85,-483.92) 1739.3,-483.92 ; U29.7@1734.48,-472.3 cw(c1722.85,-483.92) 1739.3,-483.92 ; 1739.3,-501.04 ccw(c1755.74,-501.04) U29.6@1744.11,-512.66 ; 1739.3,-501.04 ccw(c1755.74,-501.04) U29.6@1744.11,-512.66 ; 1739.3,-501.04 ccw(c1755.74,-501.04) U29.6@1744.11,-512.66 ; 1739.3,-483.92 cw(c1755.74,-483.92) U29.7@1744.11,-472.3 ; 1739.3,-483.92 cw(c1755.74,-483.92) U29.7@1744.11,-472.3 ; 1739.3,-483.92 cw(c1755.74,-483.92) U29.7@1744.11,-472.3 ; U29.6@1775.61,-522.3 cw(c1787.24,-533.92) 1787.24,-517.48 ; U29.6@1775.61,-522.3 cw(c1787.24,-533.92) 1787.24,-517.48 ; U29.6@1775.61,-522.3 cw(c1787.24,-533.92) 1787.24,-517.48 ; U29.6@1775.61,-512.66 ccw(c1787.24,-501.04) 1787.24,-517.48 ; U29.6@1775.61,-512.66 ccw(c1787.24,-501.04) 1787.24,-517.48 ; U29.6@1775.61,-512.66 ccw(c1787.24,-501.04) 1787.24,-517.48 ; 1811.53,-517.48 cw(c1811.53,-530.76) v1@1820.92,-521.37 ; 1811.53,-517.48 ccw(c1811.53,-504.2) v1@1820.92,-513.59 ; 1811.53,-517.48 cw(c1811.53,-530.76) v1@1820.92,-521.37 ; 1811.53,-517.48 ccw(c1811.53,-504.2) v1@1820.92,-513.59 ; 1811.53,-517.48 ccw(c1811.53,-504.2) v1@1820.92,-513.59 ; 1811.53,-517.48 cw(c1811.53,-530.76) v1@1820.92,-521.37
  Top Layer w15: v1(-990.19,182.52) R83.1@-990.19,237.52 ; R34.1@-990.19,1457.52 v1(-715.19,1457.52) ; R13.1@-290.19,242.52 v1(-290.19,182.52) v2(-25,182.52) ; v1(-285.19,1392.52) R55.1@-285.19,1452.52 ; R83.1@-995.49,232.22 cw(c-1008.3,219.41) -990.19,219.41 ; R83.1@-995.49,232.22 cw(c-1008.3,219.41) -990.19,219.41 ; R83.1@-995.49,232.22 cw(c-1008.3,219.41) -990.19,219.41 ; -990.19,219.41 cw(c-972.08,219.41) R83.1@-984.89,232.22 ; -990.19,219.41 cw(c-972.08,219.41) R83.1@-984.89,232.22 ; -990.19,219.41 cw(c-972.08,219.41) R83.1@-984.89,232.22 ; R34.1@-984.89,1452.22 cw(c-972.08,1439.41) -972.08,1457.52 ; R34.1@-984.89,1452.22 cw(c-972.08,1439.41) -972.08,1457.52 ; R34.1@-984.89,1452.22 cw(c-972.08,1439.41) -972.08,1457.52 ; R34.1@-984.89,1462.82 ccw(c-972.08,1475.63) -972.08,1457.52 ; R34.1@-984.89,1462.82 ccw(c-972.08,1475.63) -972.08,1457.52 ; R34.1@-984.89,1462.82 ccw(c-972.08,1475.63) -972.08,1457.52 ; R13.1@-295.49,237.22 cw(c-308.3,224.41) -290.19,224.41 ; R13.1@-295.49,237.22 cw(c-308.3,224.41) -290.19,224.41 ; R13.1@-295.49,237.22 cw(c-308.3,224.41) -290.19,224.41 ; R55.1@-290.49,1447.22 cw(c-303.3,1434.41) -285.19,1434.41 ; R55.1@-290.49,1447.22 cw(c-303.3,1434.41) -285.19,1434.41 ; R55.1@-290.49,1447.22 cw(c-303.3,1434.41) -285.19,1434.41 ; -290.19,224.41 cw(c-272.08,224.41) R13.1@-284.89,237.22 ; -290.19,224.41 cw(c-272.08,224.41) R13.1@-284.89,237.22 ; -290.19,224.41 cw(c-272.08,224.41) R13.1@-284.89,237.22 ; -285.19,1434.41 cw(c-267.08,1434.41) R55.1@-279.89,1447.22 ; -285.19,1434.41 cw(c-267.08,1434.41) R55.1@-279.89,1447.22 ; -285.19,1434.41 cw(c-267.08,1434.41) R55.1@-279.89,1447.22
  Bottom Layer w15: v1(-990.19,182.52) -640.19,182.52 ; v1(-715.19,1457.52) -715.19,1357.52 ; -316.58,1382.52 ccw(c-316.58,1423.9) v1@-287.31,1394.64 ; v1(-290.19,182.52) -640.19,182.52 ; v1(-285.19,1392.52) -295.19,1382.52 -690.19,1382.52 -715.19,1357.52 ; v2(-25,182.52) -25,-47.67 134.81,-207.48 134.81,-317.48 159.38,-342.05 159.38,-567.05 209.81,-617.48 1764.81,-617.48 1824.81,-557.48 v1(1824.81,-517.48) ; -715.19,1357.52 -715.19,1007.52 -675.19,967.52 -675.19,217.52 -640.19,182.52